# Altium PCB 4GModule-EC25-PCB.PcbDoc
Units mil, origin at the board's own origin, x right, y up, seen from the top; angles counter-clockwise.
Board outline not stored, 2 copper layers (Top Layer, Bottom Layer); 39 components, 0 nets, 228 pads, 0 vias.
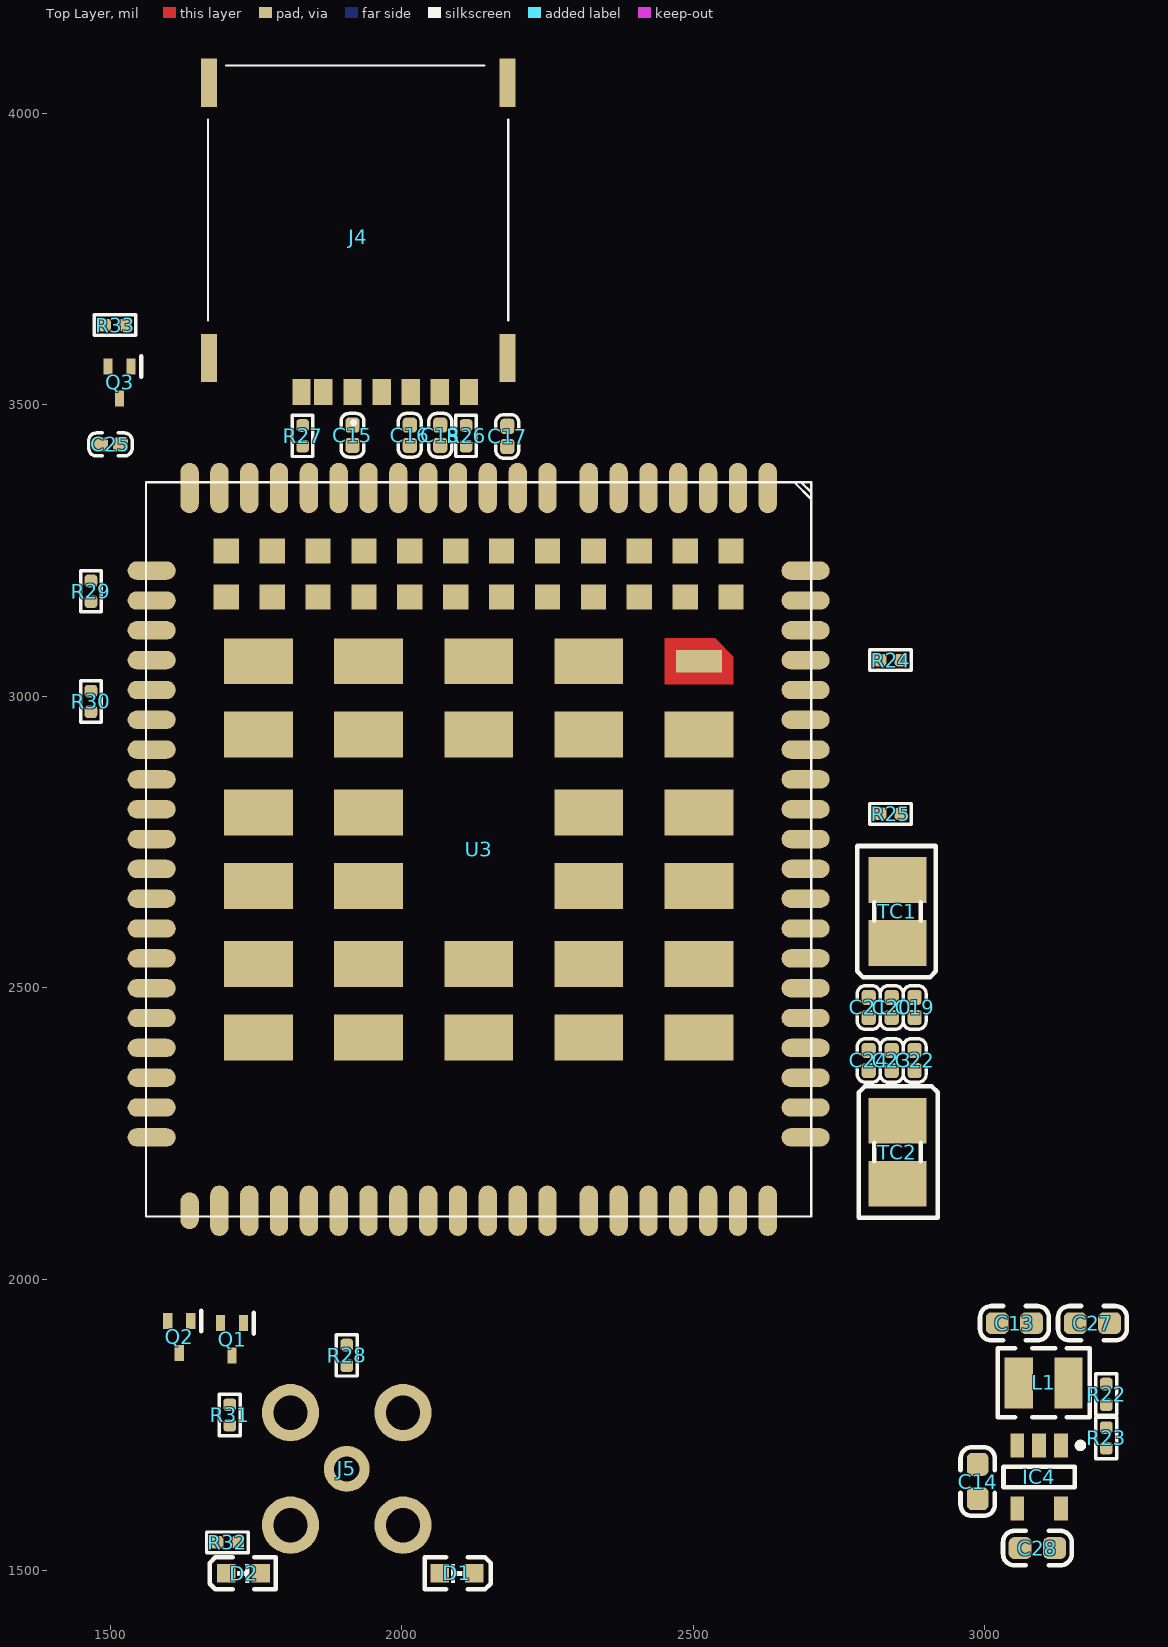
[diagram p0: Top Layer view]
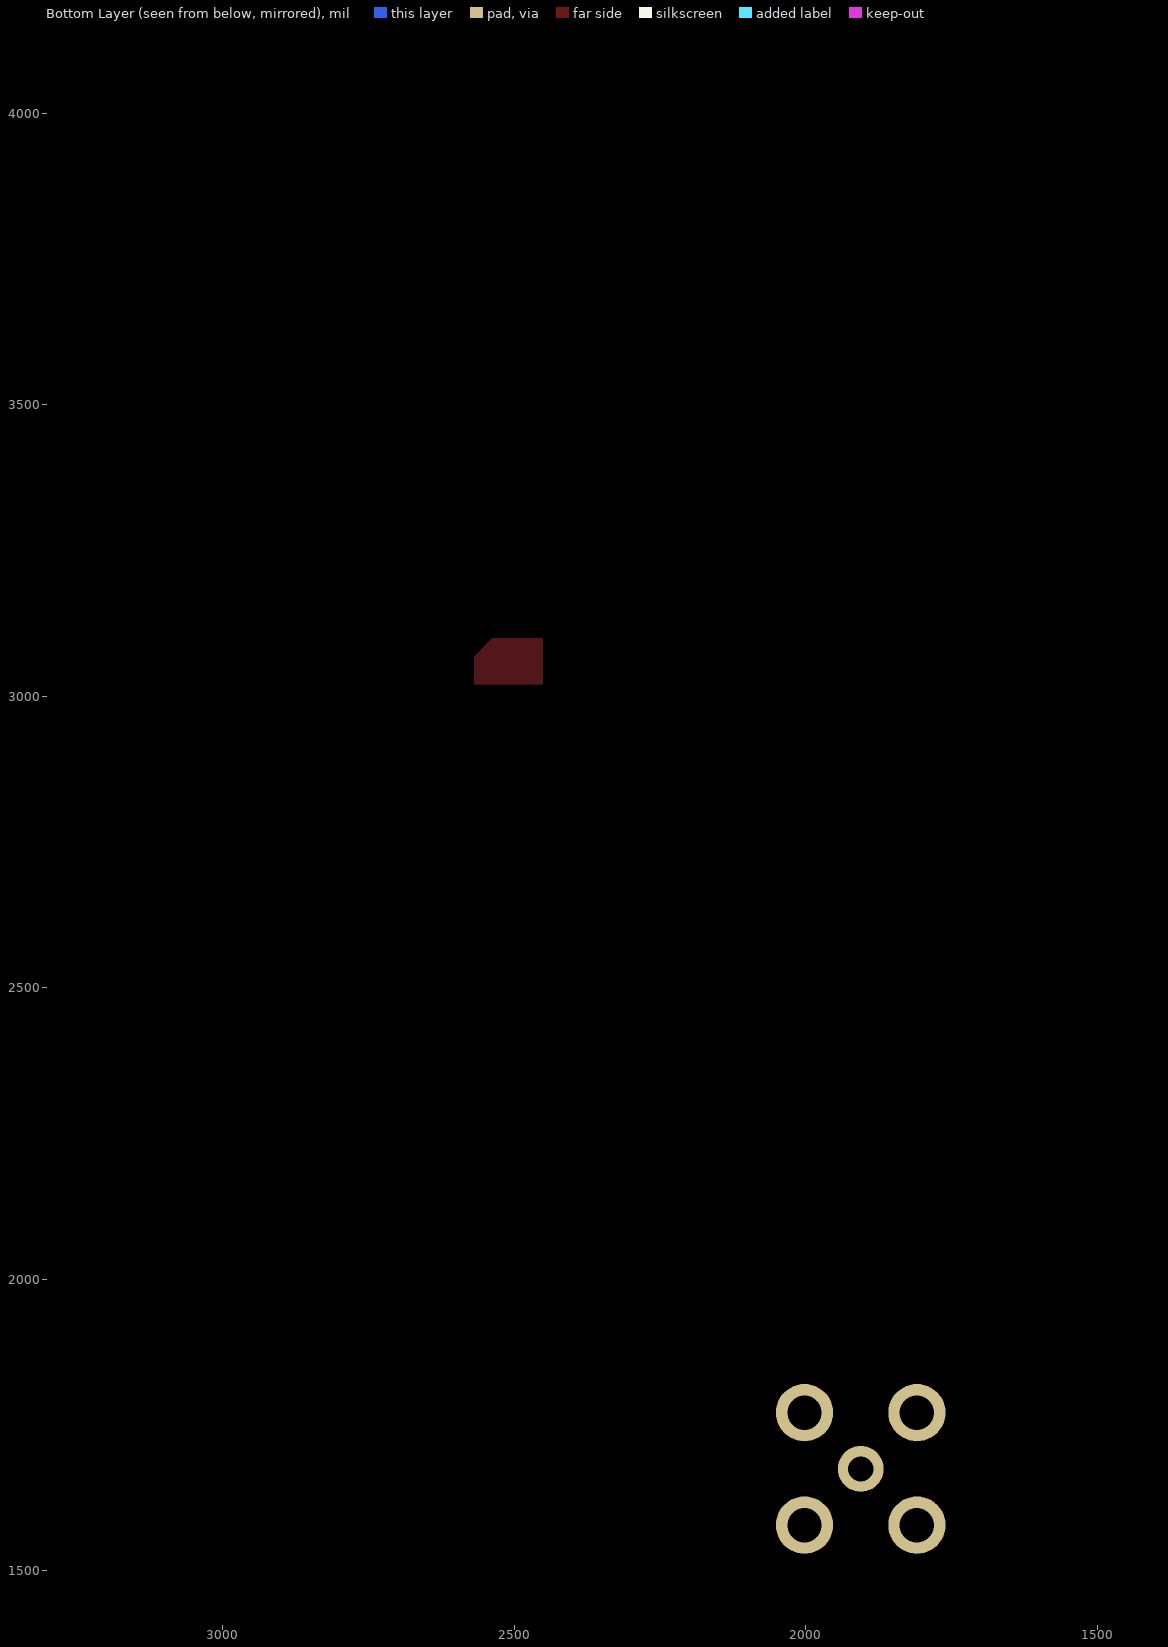
[diagram p1: Bottom Layer view, seen from below]

## Layer stack, top to bottom
Top Solder: solder mask 0.4, Solder Resist, Dk 3.5
Top Layer: signal copper 1.4
Dielectric 1: dielectric 12.6, FR-4, Dk 4.8
Bottom Layer: signal copper 1.4
Bottom Solder: solder mask 0.4, Solder Resist, Dk 3.5

## Components (designator, comment, footprint, x,y, rotation, side; value= is the part's Value field where it differs from the comment)
C13 "22uF/10V" C_0603 3051.18,1924.41 r0 top
C14 "22uF/10V" C_0603 2988.19,1652.76 r270 top
C15 "100nF/16V" C_0402 1915.35,3448.03 r90 top
C16 "33pF/50V" C_0402 2013.78,3448.03 r90 top
C17 "33pF/50V" C_0402 2181.1,3446.06 r90 top
C18 "33pF/50V" C_0402 2065.94,3448.03 r90 top
C19 "100nF/16V" C_0402 2879.92,2466.14 r90 top
C20 "33pF/50V" C_0402 2840.55,2466.14 r90 top
C21 "10pF/50V" C_0402 2801.18,2466.14 r90 top
C22 "100nF/16V" C_0402 2879.92,2375.2 r270 top
C23 "33pF/50V" C_0402 2840.55,2375.2 r270 top
C24 "10pF/50V" C_0402 2801.18,2375.2 r270 top
C25 "10nF/50V" C_0402 1500,3432.28 r0 top
C27 "22uF/10V" C_0603 3185.04,1924.41 r180 top
C28 "22uF/10V" C_0603 3090.55,1538.58 r180 top
D1 "White" LED-0603-W 2094.49,1495.28 r0 top
D2 "Blue" LED-0603-B 1728.35,1495.28 r180 top
IC4 "BL8028" SOT23-5 3093.5,1660.63 r270 top
J4 "SMN-303" SimCard_SMN-303 1925.2,3802.36 r180 top locked
J5 "RF_ANT" RF_MCX 1905.51,1674.41 r0 top locked
L1 "2.2uH/2A" L_1008 3101.38,1822.05 r0 top
Q1 "DTC144EE" SOT-523 1708.66,1892.91 r270 top
Q2 "DTC144EE" SOT-523 1618.11,1896.85 r270 top
Q3 "DTC144EE" SOT-523 1515.75,3534.65 r270 top
R22 "110kΩ/±1%" R_0402 3208.66,1802.36 r90 top
R23 "20kΩ/±1%" R_0402 3208.66,1727.56 r90 top
R24 "0Ω" R_0402 2838.58,3062.2 r0 top
R25 "10kΩ" R_0402 2838.58,2798.43 r0 top
R26 "15kΩ" R_0402 2110.24,3447.05 r270 top
R27 "10kΩ" R_0402 1829.72,3447.05 r270 top
R28 "0Ω" R_0402 1905.51,1869.29 r270 top
R29 "0Ω" R_0402 1466.57,3180.31 r90 top
R30 "10kΩ" R_0402 1466.57,2991.34 r90 top
R31 "10kΩ" R_0402 1704.72,1766.93 r270 top
R32 "10kΩ" R_0402 1700.79,1548.43 r0 top
R33 "10kΩ" R_0402 1507.87,3637.01 r0 top
TC1 "100uF/6.3V" TAJ-B/3528 2850.39,2631.1 r90 top
TC2 "100uF/6.3V" TAJ-B/3528 2850.39,2217.72 r270 top
U3 "EC20 R2.1" LCC-144_29.0X32.0X1.3P 2131.89,2737.4 r270 top locked

## Footprints (in the part's own frame and the unit in brackets; to place one, negate y for a bottom-side part, rotate by r counter-clockwise, add the part's x,y. Pads: shape width x height; smd on the part's side, far side on the other; paste and mask are expansions set on the pad)
C_0402 [mm] "Chip Capacitor, 2-Leads, Body 1.00x0.50mm, IPC Medium Density"
  rrect50% 0.66x0.62 smd: 1(-0.44,0) 2(0.44,0)
  silkscreen extent -0.95,-0.5 0.95,0.5, body extent -0.52,-0.27 0.53,0.28, height 0.55
C_0603 [mm] "Chip Capacitor, 2-Leads, Body 1.60x0.80mm, IPC Medium Density"
  rrect50% 1x0.95 smd: 1(-0.75,0) 2(0.75,0)
  silkscreen extent -1.5,-0.75 1.5,0.75, body extent -0.8,-0.4 0.8,0.4, height 0.87
L_1008 [mm] "Chip Inductor, 2-Leads, Body 2.50x2.00mm, IPC Medium Density"
  rect 1.23x2.22 smd: 1(-1.085,0) 2(1.085,0)
  silkscreen extent -2,-1.5 2,1.5, body extent -1.35,-1.1 1.35,1.1, height 1.2
LCC-144_29.0X32.0X1.3P [mm] "EC20 4G模块邮票孔封装"
  oval 2.2x0.8 smd mask+0.05: 1(-15.75,12.6) 2(-15.75,11.3) 3(-15.75,10) 4(-15.75,8.7) 5(-15.75,7.4) 6(-15.75,6.1) 7(-15.75,4.8) 8(-15.75,0.4) 9(-15.75,-0.9) 10(-15.75,-2.2) 11(-15.75,-3.5) 12(-15.75,-4.8) 13(-15.75,-6.1) 14(-15.75,-7.4) 15(-15.75,-8.7) 16(-15.75,-10) 17(-15.75,-11.3) 18(-15.75,-12.6) 38(15.75,-11.3) 39(15.75,-10) 40(15.75,-8.7) 41(15.75,-7.4) 42(15.75,-6.1) 43(15.75,-4.8) 44(15.75,-3.5) 45(15.75,-2.2) 46(15.75,-0.9) 47(15.75,0.4) 48(15.75,4.8) 49(15.75,6.1) 50(15.75,7.4) 51(15.75,8.7) 52(15.75,10) 53(15.75,11.3) 54(15.75,12.6) 141(-15.75,3) 142(-15.75,1.7) 143(15.75,1.7) 144(15.75,3)
  oval 0.8x2.1 smd mask+0.05: 19(-9.55,-14.25) 20(-8.25,-14.25) 21(-6.95,-14.25) 22(-5.65,-14.25) 23(-4.35,-14.25) 24(-3.05,-14.25) 25(-1.75,-14.25) 26(-0.45,-14.25) 27(0.85,-14.25) 28(2.15,-14.25) 29(3.45,-14.25) 30(4.75,-14.25) 31(6.05,-14.25) 32(7.35,-14.25) 33(8.65,-14.25) 34(9.95,-14.25) 35(11.25,-14.25) 36(12.55,-14.25) 55(12.55,14.25) 56(11.25,14.25) 57(9.95,14.25) 58(8.65,14.25) 59(7.35,14.25) 60(6.05,14.25) 61(4.75,14.25) 62(3.45,14.25) 63(2.15,14.25) 64(0.85,14.25) 65(-0.45,14.25) 66(-1.75,14.25) 67(-3.05,14.25) 68(-4.35,14.25) 69(-5.65,14.25) 70(-6.95,14.25) 71(-8.25,14.25) 72(-9.55,14.25) 113(-10.85,14.25) 114(-12.15,14.25) 115(-10.85,-14.25) 116(-12.15,-14.25)
  oval 1.6x0.8 smd mask+0.05: 37(15.75,-12.6)
  rect 2x3 smd mask+0.05: 85(8.2,9.6) 86(8.2,4.8) 87(8.2,0) 88(8.2,-4.8) 89(8.2,-9.6) 90(5,9.6) 91(5,4.8) 92(5,0) 93(5,-4.8) 94(5,-9.6) 95(1.6,9.6) 96(1.6,4.8) 97(1.6,-4.8) 98(1.6,-9.6) 99(-1.6,9.6) 100(-1.6,4.8) 101(-1.6,-4.8) 102(-1.6,-9.6) 103(-5,9.6) 104(-5,4.8) 105(-5,0) 106(-5,-4.8) 107(-5,-9.6) 109(-8.2,4.8) 110(-8.2,0) 111(-8.2,-4.8) 112(-8.2,-9.6)
  rect 1x2 smd: 108(-8.2,9.6)
  rect 1.1x1.1 smd mask+0.05: 117(-11,11) 118(-11,9) 119(-11,7) 120(-11,5) 121(-11,3) 122(-11,1) 123(-11,-1) 124(-11,-3) 125(-11,-5) 126(-11,-7) 127(-11,-9) 128(-11,-11) 129(-13,11) 130(-13,9) 131(-13,7) 132(-13,5) 133(-13,3) 134(-13,1) 135(-13,-1) 136(-13,-3) 137(-13,-5) 138(-13,-7) 139(-13,-9) 140(-13,-11)
  Top Layer region: -9.2,10.3 -8.4,11.1 -7.2,11.1 -7.2,8.1 -9.2,8.1 -9.2,10.3
  Top Layer pour cut-out: 3.5,2.8 -3.5,2.8 -3.5,-2.8 3.5,-2.8 3.5,2.8
  silkscreen extent -16,-14.5 16,14.5, body extent -16,-14.5 16,14.5, height 2.4
LED-0603-B [mm] "Chip Diode, 2-Leads, Body 1.55x0.80mm, IPC Medium Density"
  rect 0.8x0.8 smd: A(-0.75,0) K(0.75,0)
  silkscreen extent -1.4,-0.7 1.48,0.7, body extent -0.8,-0.4 0.8,0.4, height 0.61
LED-0603-W [mm] "Chip Diode, 2-Leads, Body 1.55x0.80mm, IPC Medium Density"
  rect 0.8x0.8 smd: A(-0.75,0) K(0.75,0)
  silkscreen extent -1.4,-0.7 1.48,0.7, body extent -0.8,-0.4 0.8,0.4, height 0.61
R_0402 [mm] "Chip Resistor, 2-Leads, Body 1.00x0.50mm, IPC Medium Density"
  rrect50% 0.55x0.55 smd: 1(-0.45,0) 2(0.45,0)
  silkscreen extent -0.9,-0.45 0.9,0.45, body extent -0.5,-0.27 0.5,0.28, height 0.4
RF_MCX [mm] "MCX PCB Skt 50Ohm Gold Pl"
  round 2.5 hole 1.5: 1(2.45,-2.45) 2(2.45,2.45) 3(-2.45,2.45) 4(-2.45,-2.45)
  round 2 hole 1.1: 5(0,0)
  body extent -3,-6.5 3,3, height 6.2
SimCard_SMN-303 [mm] "Nano SIM 自弹"
  rect 0.8x1.14 smd: C1(0.25,7.115) C2(-2.29,7.115) C3(-4.83,7.115) C5(1.52,7.115) C6(-1.02,7.115) C7(-3.56,7.115) CD1(2.47,7.115)
  round 0.375 hole 0.75 unplated: MH1(3.5,-5.115) MH2(-5,-5.115)
  rect 0.7x2.1 smd: MP1(-6.5,-6.365) MP2(-6.5,5.635) MP3(6.5,5.635) MP4(6.5,-6.365)
  silkscreen extent -6.55,-7.12 6.55,8.5, body extent -6.54,-8.26 6.55,7.4, height 1.34
SOT23-5 [mm] "SOT23, 5-Leads, Body 2.90x2.80mm, Pitch 0.95mm, IPC Medium Density"
  rect 1.05x0.6 smd: 1(-1.375,0.95) 2(-1.375,0) 3(-1.375,-0.95) 4(1.375,-0.95) 5(1.375,0.95)
  silkscreen extent -1.5,-1.55 0.45,1.93, body extent -1.4,-1.52 1.4,1.48, height 1.15
SOT-523 [mm]
  rect 0.7x0.4 smd: B(-0.8,0.5) C(0.6,0) E(-0.8,-0.5)
  silkscreen extent -1.25,0.95 -0.35,0.95, body extent -0.93,-0.78 0.67,0.8, height 0.8
TAJ-B/3528 [mm]
  rect 2x2.54 smd: 1(-1.374,0) 2(1.374,0)
  silkscreen extent -2.87,-1.68 2.85,1.75, body extent -1.72,-1.42 1.78,1.38, height 1.9

## Part data
C13 C14 C15 C16 C17 C18 C19 C20 C21 C22 C23 C24 C25 C27 C28: library part Cap_MLCC, "贴片电容"
D1 D2: library part LED_SMD, "贴片LED"
IC4: "DC-DC 芯片"
J4: library part SimCard_Nano, "NANO SIM卡座", Manufacturer_Part_Number=SMN-303
J5: "RF 天线座"
L1: library part Ind_SMD, "小功率贴片电感", 厂家型号=DFE2520124-H-2R2M, 商品编号=C161086
Q1 Q2 Q3: library part BJT_NPN, "NPN三极管"
R22 R23 R24 R25 R26 R27 R28 R29 R30 R31 R32 R33: library part Res_SMD, "贴片电阻"
TC1 TC2: library part Cap_TAN, "钽电容"
U3: library part Module_EC20-R2.1, "EC20邮票孔模组"

## Nets (pads, with @x,y where several pads share a name; then routed paths per layer and width w, separated by ;. In a path a pad name is that pad's centre, name@x,y a point inside that pad or via, vN(x,y) a via of type N, cw(c..) or ccw(c..) an arc to the next point about the centre after c; other vN are vias at no path point)
pads on no net: C13.1 C13.2 C14.1 C14.2 C15.1 C15.2 C16.1 C16.2 C17.1 C17.2 C18.1 C18.2 C19.1 C19.2 C20.1 C20.2 C21.1 C21.2 C22.1 C22.2 C23.1 C23.2 C24.1 C24.2 C25.1 C25.2 C27.1 C27.2 C28.1 C28.2 D1.A D1.K D2.A D2.K IC4.1 IC4.2 IC4.3 IC4.4 IC4.5 J4.C1 J4.C2 J4.C3 J4.C5 J4.C6 J4.C7 J4.CD1 J4.MH1 J4.MH2 J4.MP1 J4.MP2 J4.MP3 J4.MP4 J5.1 J5.2 J5.3 J5.4 J5.5 L1.1 L1.2 Q1.B Q1.C Q1.E Q2.B Q2.C Q2.E Q3.B Q3.C Q3.E R22.1 R22.2 R23.1 R23.2 R24.1 R24.2 R25.1 R25.2 R26.1 R26.2 R27.1 R27.2 R28.1 R28.2 R29.1 R29.2 R30.1 R30.2 R31.1 R31.2 R32.1 R32.2 R33.1 R33.2 TC1.1 TC1.2 TC2.1 TC2.2 U3.1 U3.2 U3.3 U3.4 U3.5 U3.6 U3.7 U3.8 U3.9 U3.10 U3.11 U3.12 U3.13 U3.14 U3.15 U3.16 U3.17 U3.18 U3.19 U3.20 U3.21 U3.22 U3.23 U3.24 U3.25 U3.26 U3.27 U3.28 U3.29 U3.30 U3.31 U3.32 U3.33 U3.34 U3.35 U3.36 U3.37 U3.38 U3.39 U3.40 U3.41 U3.42 U3.43 U3.44 U3.45 U3.46 U3.47 U3.48 U3.49 U3.50 U3.51 U3.52 U3.53 U3.54 U3.55 U3.56 U3.57 U3.58 U3.59 U3.60 U3.61 U3.62 U3.63 U3.64 U3.65 U3.66 U3.67 U3.68 U3.69 U3.70 U3.71 U3.72 U3.85 U3.86 U3.87 U3.88 U3.89 U3.90 U3.91 U3.92 U3.93 U3.94 U3.95 U3.96 U3.97 U3.98 U3.99 U3.100 U3.101 U3.102 U3.103 U3.104 U3.105 U3.106 U3.107 U3.108 U3.109 U3.110 U3.111 U3.112 U3.113 U3.114 U3.115 U3.116 U3.117 U3.118 U3.119 U3.120 U3.121 U3.122 U3.123 U3.124 U3.125 U3.126 U3.127 U3.128 U3.129 U3.130 U3.131 U3.132 U3.133 U3.134 U3.135 U3.136 U3.137 U3.138 U3.139 U3.140 U3.141 U3.142 U3.143 U3.144